# Altium PCB PCB1.PcbDoc
Units mil, origin at the board's own origin, x right, y up, seen from the top; angles counter-clockwise.
Board outline 3521.56 x 2561.56 mil, 2 copper layers (Top Layer, Bottom Layer); 40 components, 29 nets, 164 pads, 12 vias.
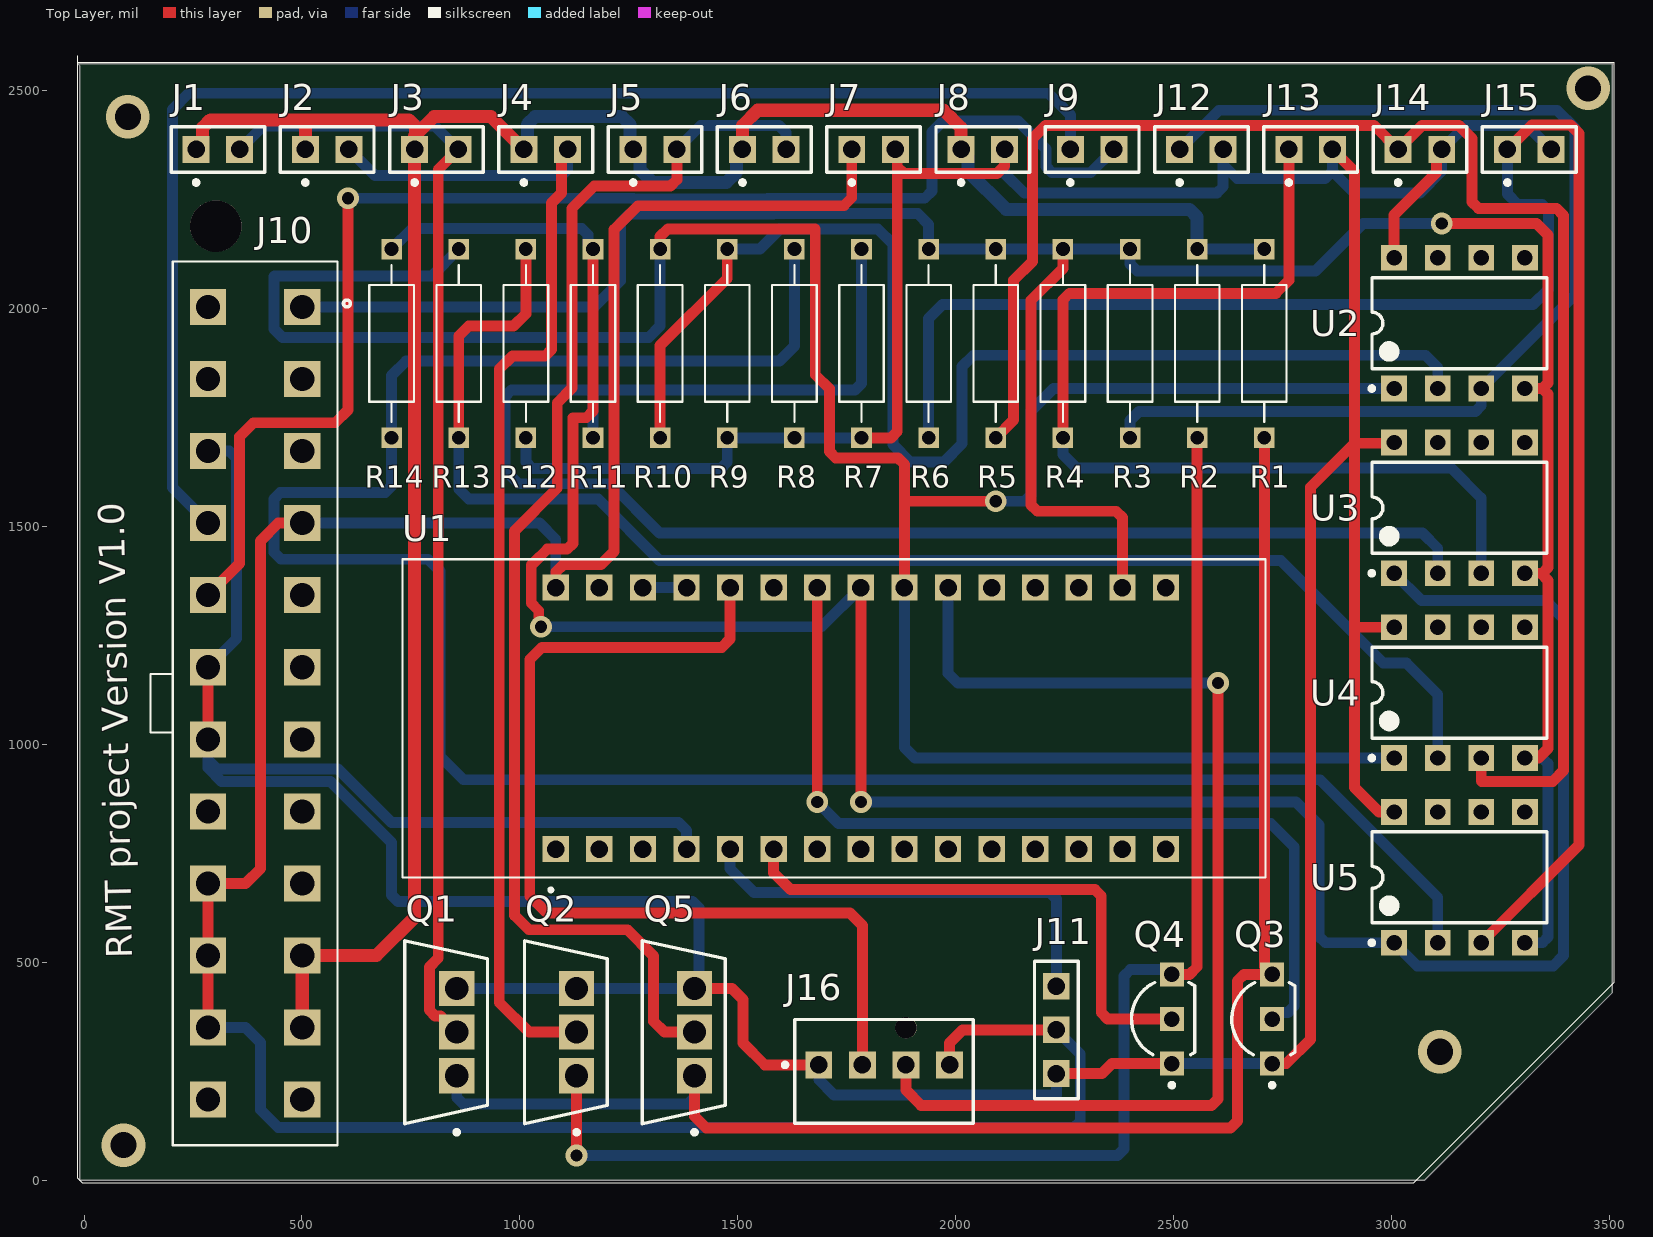
[diagram p0: Top Layer view]
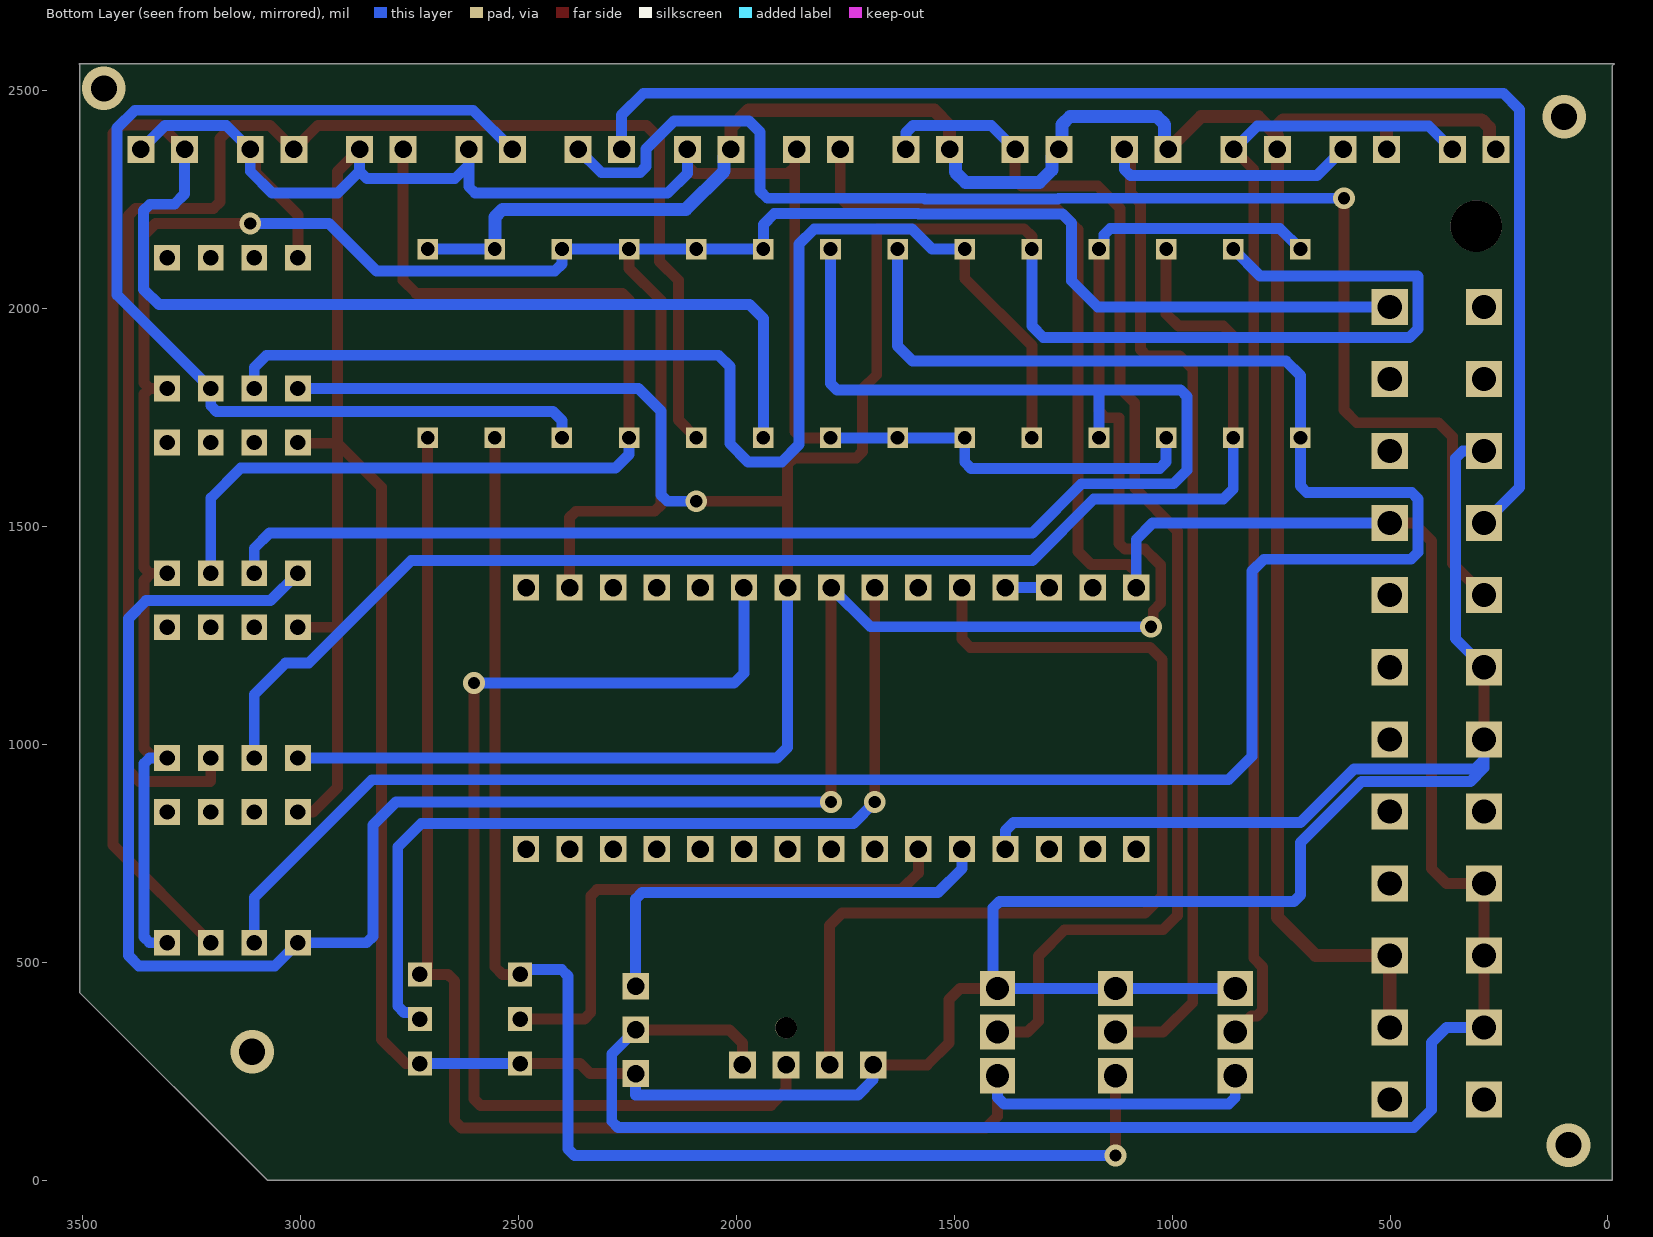
[diagram p1: Bottom Layer view, seen from below]
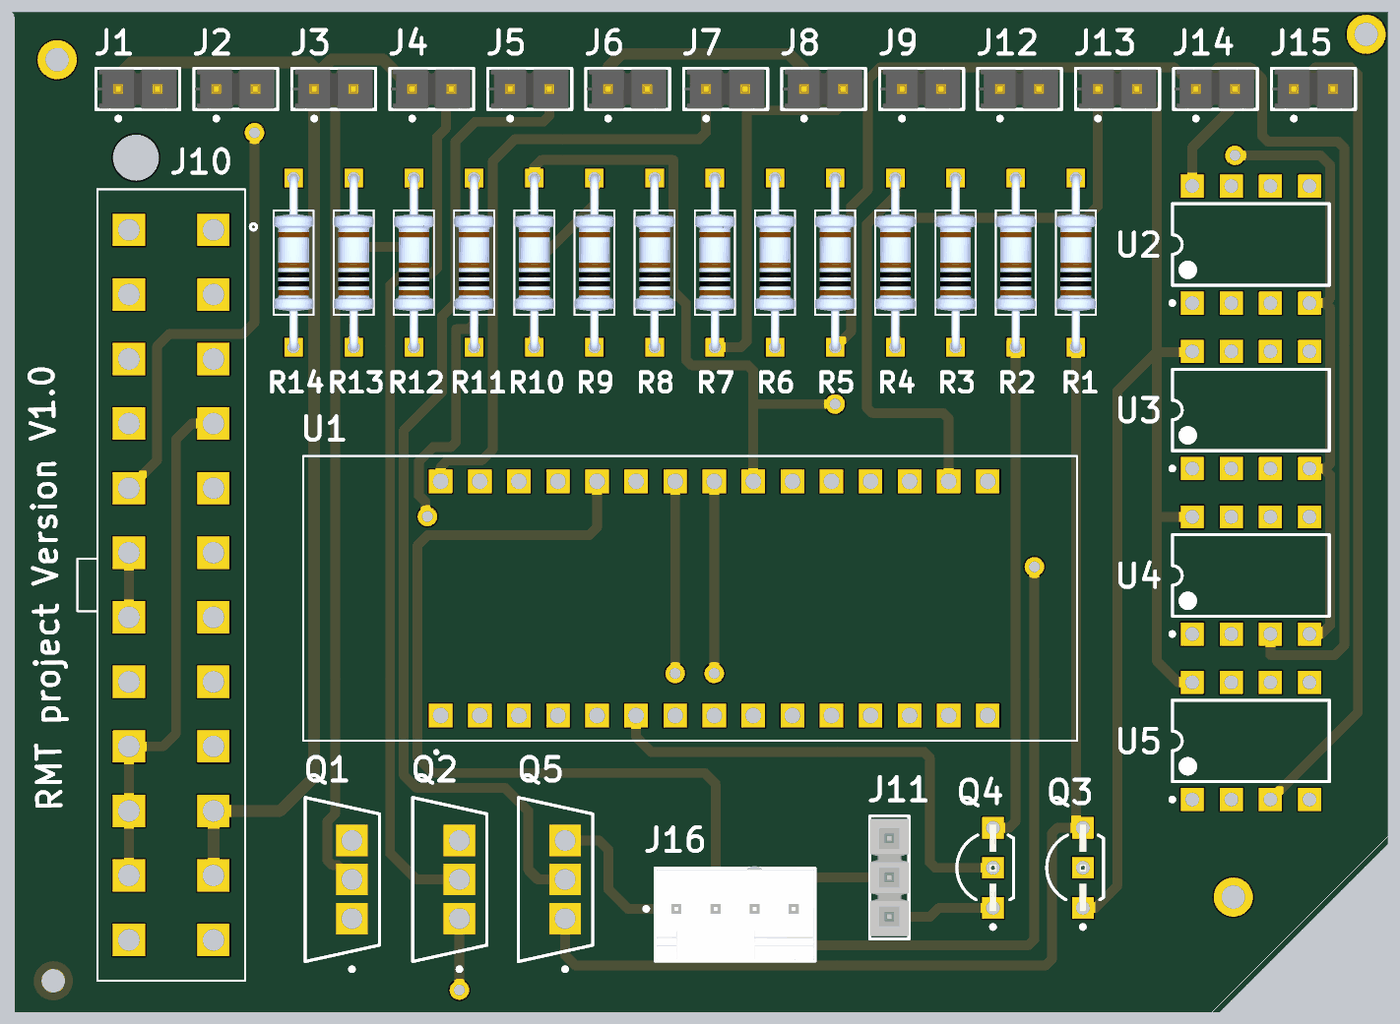
[diagram p2: 3D render of the assembled board from above, using the file's embedded part models]

## Layer stack, top to bottom
Top Solder: solder mask 0.4, Solder Resist, Dk 3.5
Top Layer: signal copper 1.4
Dielectric 1: dielectric 12.6, FR-4, Dk 4.8
Bottom Layer: signal copper 1.4
Bottom Solder: solder mask 0.4, Solder Resist, Dk 3.5

## Board outline
-14.32,2561.56 3507.24,2561.56 3505.68,2560 3505.68,430 3075.68,0 -9.32,0 -9.32,2556.56

## Design rules (kind name [scope] priority, off if disabled: settings)
Clearance [All] p1: gap=10 ignorepadtopadclearanceinfootprint=FALSE except(0: Arc-Hole Track-Hole SMDPad-Hole THPad-Hole Via-Hole Fill-Hole Poly-Hole Region-Hole Text-Hole)
PolygonConnect [All] p1: connectstyle=Relief reliefconductorwidth=10 reliefentries=4 polygonreliefangle="90 Angle" airgapwidth=10
RoutingVias [All] p1: holewidth=28 width=50 viastyle="Through Hole" minholewidth=28 minwidth=50 maxholewidth=28 maxwidth=50
SolderMaskExpansion [All] p1: expansion=4 istentingtop=FALSE
Width [All] p1: maxlimit=30 minlimit=15 preferedwidth=25 minimp=50.000000 maximp=50.000000 favimp=50.000000 checkconnectedcopper=TRUE
30 further rules are at their usual default settings.

## Components (designator, comment, footprint, x,y, rotation, side; value= is the part's Value field where it differs from the comment)
J1 "j10" FP-TSW-102-07-S-S-MFG 307.17,2365 r0 top
J2 "j10" FP-TSW-102-07-S-S-MFG 557.88,2365 r0 top
J3 "j10" FP-TSW-102-07-S-S-MFG 808.59,2365 r0 top
J4 "j10" FP-TSW-102-07-S-S-MFG 1059.3,2365 r0 top
J5 "j10" FP-TSW-102-07-S-S-MFG 1310.01,2365 r0 top
J6 "j6" FP-TSW-102-07-S-S-MFG 1560.72,2365 r0 top
J7 "j10" FP-TSW-102-07-S-S-MFG 1811.43,2365 r0 top
J8 "j16" FP-TSW-102-07-S-S-MFG 2062.14,2365 r0 top
J9 "J13" FP-TSW-102-07-S-S-MFG 2312.84,2365 r0 top
J10 "1-1775099-3" TE_1-1775099-3 392.41,1094.45 r270 top
J11 "TSW-103-07-L-S" SMTC-TSW-103-07-X-S 2230.68,445.05 r270 top
J12 "j10" FP-TSW-102-07-S-S-MFG 2563.55,2365 r0 top
J13 "j11" FP-TSW-102-07-S-S-MFG 2814.26,2365 r0 top
J14 "j10" FP-TSW-102-07-S-S-MFG 3064.97,2365 r0 top
J15 "j11" FP-TSW-102-07-S-S-MFG 3315.68,2365 r0 top
J16 "47053-3000" FP-47053-3000-MFG 1835.68,250.04 r180 top
Q1 "AUIRFZ44N" FP-TO-220AB-MFG 830.68,340 r180 top
Q2 "AUIRFZ44N" FP-TO-220AB-MFG 1105.68,340 r180 top
Q3 "2N5551RL1G" ONSC-TO-92-3-29-11_AM_BL 2725.68,370 r90 top
Q4 "2N5551RL1G" ONSC-TO-92-3-29-11_AM_BL 2495.68,370 r90 top
Q5 "AUIRFZ44N" FP-TO-220AB-MFG 1376.27,340 r180 top
R1 "1k" RESAD1100W55L680D260 2707.88,1920 r90 top
R2 "1k" RESAD1100W55L680D260 2553.87,1920 r90 top
R3 "1.5k" RESAD1100W55L680D260 2399.85,1920 r90 top
R4 "1.5k" RESAD1100W55L680D260 2245.84,1920 r90 top
R5 "1.5k" RESAD1100W55L680D260 2091.82,1920 r90 top
R6 "1.5k" RESAD1100W55L680D260 1937.8,1920 r90 top
R7 "27k" RESAD1100W55L680D260 1783.79,1920 r90 top
R8 "27k" RESAD1100W55L680D260 1629.77,1920 r90 top
R9 "27k" RESAD1100W55L680D260 1475.76,1920 r90 top
R10 "27k" RESAD1100W55L680D260 1321.74,1920 r90 top
R11 "27k" RESAD1100W55L680D260 1167.73,1920 r90 top
R12 "27k" RESAD1100W55L680D260 1013.71,1920 r90 top
R13 "27k" RESAD1100W55L680D260 859.69,1920 r90 top
R14 "27k" RESAD1100W55L680D260 705.68,1920 r90 top
U1 "NUCLEO-L432KC" MODULE_NUCLEO-L432KC 1720.68,1060 r90 top
U2 "LM358P" P0008A 3155.68,1966.58 r90 top
U3 "LM358P" P0008A 3155.68,1542.72 r90 top
U4 "LM358P" P0008A 3155.68,1118.86 r90 top
U5 "LM358P" P0008A 3155.68,695 r90 top

## Footprints (in the part's own frame and the unit in brackets; to place one, negate y for a bottom-side part, rotate by r counter-clockwise, add the part's x,y. Pads: shape width x height; smd on the part's side, far side on the other; paste and mask are expansions set on the pad)
FP-47053-3000-MFG [mm]
  rect 1.57x1.57 hole 1.02 paste-1000 mask+0: 1(3.81,-0.38) 2(1.27,-0.38) 3(-1.27,-0.38) 4(-3.81,-0.38)
  round 1.25 hole 1.25 unplated paste-1000 mask+0: ""(-1.27,-2.54)
  silkscreen extent -5.2,-3.02 5.9,3.02, body extent -5.3,-3.26 5.3,3.12, height 0.25
FP-TO-220AB-MFG [mm]
  rect 2.05x2.05 hole 1.35 paste-1000 mask+0: 1(-0.62,2.54) 2(-0.62,0) 3(-0.62,-2.54)
  silkscreen extent -2.41,-5.34 2.41,5.96
FP-TSW-102-07-S-S-MFG [mm]
  rect 1.57x1.57 hole 1.02 paste-1000 mask+0: 1(-1.27,0) 2(1.27,0)
  silkscreen extent -2.73,-2.05 2.73,1.34, body extent -2.67,-1.27 2.54,1.27, height 8.71
MODULE_NUCLEO-L432KC [mm]
  rect 1.53x1.53 hole 1.02: CN3_1(-7.62,16.215) CN3_2(-7.62,13.675) CN3_3(-7.62,11.135) CN3_4(-7.62,8.595) CN3_5(-7.62,6.055) CN3_6(-7.62,3.515) CN3_7(-7.62,0.975) CN3_8(-7.62,-1.565) CN3_9(-7.62,-4.105) CN3_10(-7.62,-6.645) CN3_11(-7.62,-9.185) CN3_12(-7.62,-11.725) CN3_13(-7.62,-14.265) CN3_14(-7.62,-16.805) CN3_15(-7.62,-19.345) CN4_1(7.62,16.215) CN4_2(7.62,13.675) CN4_3(7.62,11.135) CN4_4(7.62,8.595) CN4_5(7.62,6.055) CN4_6(7.62,3.515) CN4_7(7.62,0.975) CN4_8(7.62,-1.565) CN4_9(7.62,-4.105) CN4_10(7.62,-6.645) CN4_11(7.62,-9.185) CN4_12(7.62,-11.725) CN4_13(7.62,-14.265) CN4_14(7.62,-16.805) CN4_15(7.62,-19.345)
  silkscreen extent -10.1,-25.14 9.27,25.14
ONSC-TO-92-3-29-11_AM_BL [mm] "TO, 3-Leads, Body Dia 4.7mm, Pitch 2.6mm"
  rect 1.4x1.4 hole 0.9: 1(-2.6,0) 2(0,0) 3(2.6,0)
  silkscreen extent -3.97,-1.34 2.13,2.35, body extent -2.84,-1.34 2.84,2.35, height 5.33
P0008A [mm] "DIP, 8-Leads, Body 10.15x6.6mm, Pitch 2.54mm"
  rect 1.5x1.5 hole 0.9: 1(-3.81,3.81) 2(-3.81,1.27) 3(-3.81,-1.27) 4(-3.81,-3.81) 5(3.81,-3.81) 6(3.81,-1.27) 7(3.81,1.27) 8(3.81,3.81)
  silkscreen extent -3.93,-5.1 2.65,5.23, body extent -3.95,-5.07 3.95,5.07, height 5.08
RESAD1100W55L680D260 [mm]
  rect 1.2x1.2 hole 0.8: 1(-5.5,0) 2(5.5,0)
  silkscreen extent -4.58,-1.3 4.58,1.3, body extent -5.77,-1.29 5.77,1.29, height 2.6
SMTC-TSW-103-07-X-S [mm] ".025 SQ Post Terminal Strip Assembly, 1x3 Pins, Vertical, 2.54mm Pitch, Male"
  rect 1.55x1.55 hole 1.02: 1(0,0) 2(2.54,0) 3(5.08,0)
  silkscreen extent -1.46,-1.27 6.54,1.27, body extent -1.27,-1.27 6.35,1.27, height 8.38
TE_1-1775099-3 [mm]
  rect 2.1x2.1 hole 1.4: 1(-23.1,2.75) 2(-23.1,-2.75) 3(-18.9,2.75) 4(-18.9,-2.75) 5(-14.7,2.75) 6(-14.7,-2.75) 7(-10.5,2.75) 8(-10.5,-2.75) 9(-6.3,2.75) 10(-6.3,-2.75) 11(-2.1,2.75) 12(-2.1,-2.75) 13(2.1,2.75) 14(2.1,-2.75) 15(6.3,2.75) 16(6.3,-2.75) 17(10.5,2.75) 18(10.5,-2.75) 19(14.7,2.75) 20(14.7,-2.75) 21(18.9,2.75) 22(18.9,-2.75) 23(23.1,2.75) 24(23.1,-2.75)
  round 3 hole 3 unplated: ""(-27.8,-2.29)
  silkscreen extent -25.75,-6.1 25.75,5.55

## Part data
J1 J2 J3 J4 J5 J6 J7 J8 J9 J12 J13 J14 J15: library part CMP-1681-00004-5, "CONN HEADER VERT 2POS 2.54MM", Color=Black, Flammability Rating="UL94 V-0", Max Current Rating=7.6A, Max Operating Temperature=125°C, Max Voltage Rating (AC)=550V, Min Operating Temperature=-55°C, Package Quantity=1, Connector Type=Header, Contact Finish - Mating=GOLD, Contact Material=Bronze, Contact Mating Length=0.23inch, Contact Plating=Gold, Contact Shape=Square, Contact Type="Male Pin", Depth=2.54mm, Fastening Type=Pull, Gender=Male, Housing Color=Black, Housing Material=Polyester, Insulation Color=Black, Insulation Material=PBT, Lead Free="Lead Free", Length=5.08mm, Mount="Through Hole", Number of Contacts=2, Number of Positions=2, Number of Rows=1, Orientation=Straight, Packaging=Bulk, Pitch=2.54mm, Radiation Hardening=No, REACH SVHC="No SVHC", RoHS Compliant=Yes, Series=TSW, Termination=Solder, Width=2.54mm
J10: "Conn Power PL 24 POS 4.2mm Solder ST Thru-Hole 24 Terminal 1 Port Box/Tray", Package=None, Centerline_Pitch="4.2 mm[.165 in]", Digi-Key_Part_Number=A127799-ND, Digi-Key_Purchase_URL=https://www.digikey.com.au/product-detail/en/te-connectivity-amp-connectors/1-1775099-3/A127799-ND/5272985?utm_source=snapeda&utm_medium=aggregator&utm_campaign=symbol, MF="TE Connectivity", MP=1-1775099-3, Number_of_Positions=24, Product_Type=Connector, SnapEDA_Link=https://www.snapeda.com/parts/1-1775099-3/TE%20Connectivity%20AMP%20Connectors/view-part/890778/?ref=snap, TE_purchase_URL=https://www.te.com/usa-en/product-1-1775099-3.html?te_bu=Cor&te_type=disp&te_campaign=seda_glo_cor-seda-global-disp-prtnr-fy19-seda-model-bom-cta_sma-317_1&elqCampaignId=32493
J11: library part CMP-1024-00334-1, "0.025\" SQ Post Header, Through-hole, Vertical, -55 to 125 degC, 2.54 mm Pitch, 3-Pin, Male, RoHS", Manufacturer=Samtec, Temperature Range="-55 to 125 degC", ComponentLink1Description="Manufacturer URL", ComponentLink1URL=http://www.samtec.com, ComponentLink2Description=Datasheet, ComponentLink2URL=http://www.samtec.com/documents/webfiles/pdf/TSW_TH.PDF, ComponentLink3Description="Package Specification", ComponentLink3URL=http://www.samtec.com/documents/webfiles/cpdf/TSW-XXX-XX-XXX-X-XX-XXX-MKT.pdf, DatasheetVersion=F-214, Mounting Technology=Through-hole, Orientation=Vertical, PackageDescription=".025[0.64] SQ. Post Terminal Strip Assembly", PackageReference=TSW-103-07-X-S, PackageVersion="DM, 8/1988", PartNumber=TSW-103-07-L-S, Pitch="2.54 mm", RoHS=True
J16: library part CMP-04776-000447-1, "CONN HEADER VERT 4POS 2.54MM", Current Rating=4A, Max Operating Temperature=75°C, Min Operating Temperature=0°C, Package Quantity=12000, Voltage Rating=250V, Contact Material="Copper Alloy", Contact Plating=Tin, Gender=Male, Glow Wire Compliant=Non-compliant, Halogen Free="Low Halogen", Mount="Through Hole", Number of Circuits=4, Number of Contacts=4, Number of Positions=4, Number of Rows=1, Orientation=Straight, Packaging=Bulk, Pitch=2.54mm, REACH SVHC="No SVHC", RoHS Compliant=Yes, Series=47053, Termination="Through Hole"
Q1 Q2 Q5: library part CMP-00196-65872631-1, "AUIRFZ44N Automotive Q101 55V Single N-Channel HEXFET Power MOSFET in a TO-220AB Package, TO220-3, RoHS", Case/Package=TO-220AB, Continuous Drain Current (ID)=49A, Drain to Source Breakdown Voltage=55V, Drain to Source Resistance=17.5mΩ, Gate to Source Voltage (Vgs)=20V, Input Capacitance=1.47nF, Max Junction Temperature (Tj)=175°C, Max Power Dissipation=94W, Min Operating Temperature=-55°C, Package Quantity=1000, Threshold Voltage=2V, Contact Plating=Tin, Drain to Source Voltage (Vdss)=55V, Element Configuration=Single, Fall Time=60ns, Height=16.51mm, Length=10.66mm, Lifecycle Status=Obsolete, Max Operating Temperature=175°C, Mount="Surface Mount, Through Hole", NexarPartId=65872631, Number of Channels=1, Number of Elements=1, Number of Pins=3, On-State Resistance=17.5mΩ, Power Dissipation=94W, Radiation Hardening=No, Rds On Max=17.5mΩ, REACH SVHC="No SVHC", Rise Time=69ns, RoHS=Compliant, Schedule B="8541290080, 8541290080", Turn-Off Delay Time=44ns, Turn-On Delay Time=7.3ns, Width=4.82mm
Q3 Q4: library part CMP-1048-01479-1, "Amplifier Transistor, NPN Silicon, 3-Pin TO-92, Pb-Free, Tape and Reel", Manufacturer="On Semiconductor", ComponentLink1Description="Manufacturer URL", ComponentLink1URL=http://www.onsemi.com/, ComponentLink2Description=Datasheet, ComponentLink2URL=http://www.onsemi.com/pub_link/Collateral/2N5550-D.PDF, ComponentLink3Description="Package Specification", ComponentLink3URL=http://www.onsemi.com/pub_link/Collateral/MAC97-D.PDF, DatasheetVersion="Rev. 5", fT Min (MHz)=100, IC Continuous (A)=0.6, Mounting Technology="Through Hole", PackageDescription="3-Pin Transistor Outline, Body 4.825 x 3.685 mm, Pitch 1.27 mm", PackageReference=TO-92-3-29-11_AM_BL, PackageVersion="Rev. AM", Packing="Tape and Reel", PartNumber=2N5551RL1G, Polarity=NPN, RoHS=TRUE
R1 R2 R3 R4 R5 R6 R7 R8 R9 R10 R11 R12 R13 R14: library part MFR-25FBF52-1K, "1.07 kOhms Â±1% 0.25W, 1/4W Through Hole Resistor Axial - Metal Film", Package="Axial Yageo", Availability="In Stock", Check_prices=https://www.snapeda.com/parts/MFR-25FBF52-1K/Yageo/view-part/?ref=eda, MF=Yageo, MP=MFR-25FBF52-1K, Price=None, Purchase-URL=https://pricing.snapeda.com/search/part/MFR-25FBF52-1K/?ref=eda, SnapEDA_Link=https://www.snapeda.com/parts/MFR-25FBF52-1K/Yageo/view-part/?ref=snap
U1: "STM32 Nucleo-32 development board with STM32L432KC MCU, supports Arduino connectivity", Package=None, Availability=Unavailable, MP=NUCLEO-L432KC, Price=None
U2 U3 U4 U5: library part CMP-2000-06549-1, "Dual Operational Amplifier, 3 to 32 V, 0 to 70 degC, 8-Pin PDIP (P), RoHS, Tape and Reel", Manufacturer="Technik Industrial", Package Description="8-Pin Double In-line Package, Body 9.59 x 6.35 mm, Pitch 2.54 mm", Package Reference=P8, Datasheet URL=http://www.ti.com/lit/ds/symlink/lm358.pdf, Datasheet Version="Rev. T, 04/2015", Manufacturer URL=http://www.technik.com.hk/, Mounting Technology=ThroughHole, Package URL=http://www.ti.com/lit/ml/mpdi001b/mpdi001b.pdf

## Via types
v1: diameter 50, hole 28, Top Layer to Bottom Layer, 8 vias
v2: diameter 100, hole 60, Top Layer to Bottom Layer, 3 vias
v3: diameter 100, hole 60, Top Layer to Bottom Layer, tented top, 1 vias

## Nets (pads, with @x,y where several pads share a name; then routed paths per layer and width w, separated by ;. In a path a pad name is that pad's centre, name@x,y a point inside that pad or via, vN(x,y) a via of type N, cw(c..) or ccw(c..) an arc to the next point about the centre after c; other vN are vias at no path point)
GND: J7.2 J8.2 J10.6 J10.12 J10.14 J11.3 J12.2 J13.2 J14.2 J15.2 J16.1 Q1.3 Q2.3 Q3.1 Q4.1 Q5.3 R7.1 R8.1 R9.1 R12.1 U1.CN3_4 U2.8 U3.8 U4.8 U5.8 | length 12798.2
  Top Layer w25: J10.14 284.68,1011.77 284.68,1177.13 J10.12 ; Q5.3 1486.68,440 1511.68,415 1511.68,315 1561.68,265 J16.1 ; R7.1 1851.03,1703.46 1865.68,1718.11 1865.68,2325.5 ; J7.2 1865.68,2365 1865.68,2325.5 ; J8.2 2112.14,2327.46 2094.68,2310 1881.18,2310 1865.68,2325.5 ; J11.3 2335.73,245.05 2358.32,267.64 Q4.1 ; Q3.1 2758.18,267.64 2813.68,323.14 2813.68,1590.17 2914.54,1691.03 ; J13.2 2914.54,2314.72 2914.54,1691.03 ; U3.8@3003.99,1691.03 2914.54,1691.03 ; U5.8 2970.68,845 2914.54,901.14 2914.54,1268.86 ; U4.8 2914.54,1268.86 ; U2.8 3005.68,2215 3102.9,2312.22 3102.9,2352.93 J14.2 ; 2914.54,1268.86 2914.54,1691.03
  Bottom Layer w25: J10.14 284.14,965 ; J10.12 349.68,1242.66 349.68,1656.69 333.18,1673.19 J10.6 ; Q1.3 Q2.3 Q5.3 1410.68,450 1410.68,625.36 1396.03,640 720.32,640 705.68,654.65 705.68,775 565.68,915 315.68,915 284.14,946.54 284.14,965 ; R12.1 1013.71,1647.65 1028.35,1633 1461.11,1633 1475.76,1647.65 R9.1 R8.1 1629.77,1703 1783.79,1703 R7.1 ; U1.CN3_4 1382.29,802.5 1363.79,821 705.68,821 582.68,944 305.14,944 284.14,965 ; J16.1 1685.68,231 1720.68,196 2230.68,196 J11.3 ; J8.2 2112.14,2310.14 2157.27,2265 2598.91,2265 2613.55,2279.65 2613.55,2330.13 ; Q4.1 Q3.1 ; J12.2 2613.55,2330.13 ; J13.2 2864.26,2315 ; J15.2 3310.68,2420 3169.97,2420 J14.2 3114.97,2315 3064.97,2265 2914.26,2265 2864.26,2315 ; 2613.55,2330.13 2645.68,2298 2847.26,2298 2864.26,2315
NetJ1_1: J1.1 J2.1 J3.1 J4.1 J5.1 J6.1 J8.1 J10.19 J10.21 R1.2 R2.2 | length 5414.1
  Top Layer w25: 489.88,2433 507.88,2415 ; J3.1 758.59,2395.91 758.59,2420.09
  Top Layer w30: J1.1 272.2,2380.02 272.2,2415.43 289.77,2433 489.88,2433 745.68,2433 758.59,2420.09 ; J10.21 J10.19 670.68,515.71 758.59,603.62 J3.1 ; J2.1 507.88,2415 ; 758.59,2395.91 803.37,2440.7 933.6,2440.7 J4.1 ; J6.1 1510.72,2420.04 1545.68,2455 1972.14,2455 2012.14,2415 J8.1
  Bottom Layer w25: R2.2 R1.2
  Bottom Layer w30: J4.1 1017.03,2372.73 1017.03,2422.73 1035,2440.7 1234.31,2440.7 1252.28,2422.73 J5.1@1252.28,2372.73 ; J5.1 1275.92,2349.1 1275.92,2317.85 1304.55,2289.21 1473.38,2289.21 1497.22,2313.05 1497.22,2351.5 J6.1 ; J8.1 2027.81,2349.32 2027.81,2315.23 2115.54,2227.5 2536.29,2227.5 2553.87,2209.93 R2.2
NetJ1_2: J1.2 J3.2 Q1.2 | length 2632
  Top Layer w25: Q1.2 817.94,377.15 805.41,377.15 792.23,390.33 792.23,489.67 812.68,510.12 812.68,2319.09 J3.2
  Bottom Layer w25: J1.2 411.17,2419 804.59,2419 J3.2
NetJ2_2: J2.2 J4.2 Q2.2 | length 2849.9
  Top Layer w25: J4.2 1095.68,2351.38 1095.68,2265 1072.68,2242 1072.68,1905.97 1058.03,1891.33 982.68,1891.33 952.69,1861.33 952.69,407.99 1020.68,340 Q2.2
  Bottom Layer w25: J2.2 667.88,2305 1095.68,2305 1109.3,2318.62 J4.2
NetJ5_2: J5.2 J6.2 Q5.2 | length 2944.5
  Top Layer w25: J5.2 1360.01,2295.65 1345.37,2281 1170.68,2281 1119.68,2230 1119.68,1817.66 1085.68,1783.66 1085.68,1588.08 987.69,1490.08 987.69,607.99 1020.68,575 1246.68,575 1306.68,515 1306.68,365 1331.68,340 Q5.2
  Bottom Layer w25: J5.2 1415.01,2420 1594.68,2420 1610.72,2403.96 J6.2
NetJ7_1: J7.1 J10.7 J10.18 J10.20 J10.22 J11.2 J16.4 U1.CN4_1 | length 6383.9
  Top Layer w25: J10.22 J10.20 J10.18 370.74,681.06 404.68,715 404.68,1466.83 445.68,1507.83 J10.7 ; U1.CN4_1 1082.29,1395.61 1099.68,1413 1185.87,1413 1215.68,1442.8 1215.68,2181 1270.68,2236 1743.17,2236 1761.43,2254.26 J7.1 ; J16.4 1985.68,315 2015.73,345.05 J11.2
  Bottom Layer w25: J10.22 370.68,350.35 404.68,316.35 404.68,162 445.68,121 2271.03,121 2285.68,135.65 2285.68,290.05 J11.2 ; J10.7 1044.84,1507.83 1082.29,1470.38 U1.CN4_1
NetJ9_1: J9.1 J10.8 | length 3158.2
  Bottom Layer w25: J10.8 202.68,1589.3 202.68,2457 239.68,2494 2212.94,2494 2262.84,2444.1 J9.1
NetJ9_2: J9.2 J10.10 | length 3159.2
  Top Layer w25: J10.10 356.68,1415.02 356.68,1706 388.68,1738 576.5,1738 605.68,1767.18 v1(605.68,2253)
  Bottom Layer w25: v1(605.68,2253) 1260.41,2253 1261.7,2251.71 1566.89,2251.71 1568.18,2253 1928.68,2253 1945.68,2270 1945.68,2405 1970.68,2430 2142.68,2430 2206.68,2366 2206.68,2325.59 2220.68,2311.59 2309.44,2311.59 J9.2
NetJ10_1: J10.1 R3.2 R4.2 R5.2 R6.2 U1.CN4_14 U2.4 U3.4 U4.4 U5.4 | length 6045.5
  Top Layer w25: R4.2 2245.84,2092.16 2172.68,2019 2172.68,1549.65 2187.32,1535 2367.65,1535 2382.29,1520.36 U1.CN4_14 ; v1(3114.97,2195) 3332.68,2195 3358.68,2169 3358.68,1829.57 3345.68,1816.57 ; U4.4 3336.56,968.86 3358.68,990.97 3358.68,1376.53 3342.49,1392.72 ; U3.4 3342.49,1392.72 ; U2.4 3345.68,1816.57 ; 3342.49,1392.72 3345.68,1392.72 3358.68,1405.72 3358.68,1803.57 3345.68,1816.57
  Bottom Layer w25: J10.1 1170.68,2003.9 1230.68,2063.9 1230.68,2196 1251.39,2216.71 1581.39,2216.71 1582.67,2218 1912.68,2218 1937.8,2192.87 R6.2@1937.8,2137 ; R6.2 R6.2@1937.8,2137 ; R5.2 R5.2@2091.82,2137 ; v1(3114.97,2195) 2934.18,2195 2825.18,2086 2416.35,2086 2399.85,2102.5 R3.2 R4.2 2245.84,2137 R5.2@2091.82,2137 ; U5.4 3345.68,545 3358.68,558 3358.68,955.86 3345.68,968.86 U4.4 ; R6.2@1937.8,2137 R5.2@2091.82,2137
NetJ12_1: J12.1 R3.1 U2.3 | length 2546.7
  Bottom Layer w25: R3.1 2399.85,1743.17 2420.68,1764 3192.18,1764 3205.68,1777.5 U2.3 3420.68,2031.57 3420.68,2414 3379.68,2455 2603.55,2455 J12.1
NetJ13_1: J13.1 R4.1 U3.3 | length 2365.8
  Top Layer w25: R4.1 2245.84,2020.36 2260.48,2035 2734.26,2035 2764.26,2065 J13.1
  Bottom Layer w25: R4.1 2245.84,1665 2276.84,1634 3136.68,1634 3205.68,1565 U3.3
NetJ14_1: J14.1 R5.1 U4.3 | length 3695
  Top Layer w25: R5.1 2132.68,1744.32 2132.68,2065 2175.68,2108 2175.68,2390 2205.68,2420 2959.97,2420 J14.1 3069.97,2420 3154.68,2420 3184.68,2390 3184.68,2244.65 3199.32,2230 3378.03,2230 3394.68,2213.36 3394.68,940 3369.68,915 3206.68,915 3205.68,916 U4.3
NetJ15_1: J15.1 R6.1 U5.3 | length 4260.5
  Top Layer w25: U5.3 3429.68,769 3429.68,2401.5 3410.18,2421 3321.68,2421 J15.1
  Bottom Layer w25: R6.1 1937.8,1977.13 1969.68,2009 3324.69,2009 3359.68,2043.99 3359.68,2224.82 3345.03,2239.46 3289.18,2239.46 3265.68,2262.96 J15.1
NetJ16_2: J16.2 U1.CN4_5 | length 2250.8
  Top Layer w25: U1.CN4_5 1482.29,1241.65 1463.15,1222.5 1050.32,1222.5 1022.69,1194.86 1022.69,652.31 1062,613 1757.68,613 1785.68,585 J16.2
NetJ16_3: J16.3 U1.CN4_10 | length 2574.2
  Top Layer w25: J16.3 1885.68,207 1920.68,172 2587.03,172 2601.68,186.65 v1(2601.68,1141)
  Bottom Layer w25: U1.CN4_10 1982.29,1163.39 2004.68,1141 v1(2601.68,1141)
NetQ1_1: Q1.1 Q3.3 Q5.1 R1.1 | length 3660.2
  Top Layer w25: Q5.1 1400.68,146.99 1427.67,120 2630.68,120 2646.48,135.8 2646.48,457.72 2661.13,472.36 Q3.3 2707.88,490.16 R1.1
  Bottom Layer w25: Q1.1 855.09,190 870.09,175 1385.68,175 1400.68,190 Q5.1
NetQ2_1: Q2.1 Q4.3 R2.1 | length 3241.1
  Top Layer w25: v1(1130.09,57) Q2.1 ; Q4.3 2536.23,472.36 2553.87,490 R2.1
  Bottom Layer w25: v1(1130.09,57) 2371.03,57 2385.68,71.65 2385.68,468.6 2400.32,483.25 2484.8,483.25 Q4.3
NetQ3_2: Q3.2 U1.CN4_7 | length 2057.6
  Top Layer w25: v1(1682.29,868) U1.CN4_7
  Bottom Layer w25: v1(1682.29,868) 1731.29,819 2722.68,819 2776.68,765 2776.68,399.7 2762.03,385.06 2740.74,385.06 Q3.2
NetQ4_2: Q4.2 U1.CN3_6 | length 1263.7
  Top Layer w25: U1.CN3_6 1582.29,705.39 1620.68,667 2319.03,667 2333.68,652.36 2333.68,384.65 2348.32,370 Q4.2
NetR7_2: R7.2 R11.1 U3.2 | length 3690.9
  Bottom Layer w25: R11.1 1167.73,1809.87 1170.97,1813.11 ; R7.2 1783.79,1827.76 1769.14,1813.11 1170.97,1813.11 ; U3.2 3105.68,1450 3070.68,1485 1320.68,1485 1207.68,1598 996.68,1598 965.68,1629 965.68,1798.47 980.32,1813.11 1170.97,1813.11
NetR8_2: R8.2 R14.1 U5.2 | length 5183.7
  Bottom Layer w25: R8.2 1629.77,1914.09 1595.56,1879.88 739.14,1879.88 705.68,1846.42 R14.1 705.68,1592.65 691.03,1578 450.32,1578 435.68,1563.36 435.68,1441 451.68,1425 789.5,1425 816.68,1397.82 816.68,973 870.68,919 2835.68,919 3105.68,649 U5.2
NetR9_2: R9.2 R10.1 U2.2 | length 2902
  Top Layer w25: R10.1 1321.74,1915 1475.76,2069.02 R9.2
  Bottom Layer w25: R9.2 1550.71,2136.54 1596.83,2182.66 1821.02,2182.66 1855.68,2148 1855.68,1688 1895.68,1648 1972.68,1648 2014.68,1690 2014.68,1867.04 2040.64,1893 3077.68,1893 3105.68,1865 U2.2
NetR10_2: R10.2 R13.2 U1.CN4_9 U2.1 U4.1 | length 5878
  Top Layer w25: R10.2 1321.74,2165 1339.74,2183 1676.68,2183 1677.68,2182 1677.68,1848.28 1710,1815.96 1710,1671.99 1724.64,1657.34 1867.65,1657.34 1882.29,1642.7 1882.29,1558 ; U1.CN4_9 1882.29,1558 ; v1(2091.68,1558) 1882.29,1558
  Bottom Layer w25: R13.2 798.16,2075 436.68,2075 435.68,2074 435.68,1953.5 455.18,1934 1295.68,1934 1321.74,1960.06 R10.2 ; U1.CN4_9 1882.29,993.39 1906.82,968.86 U4.1 ; v1(2091.68,1558) 2158.03,1558 2172.68,1572.65 2172.68,1765 2224.25,1816.57 U2.1
NetR11_2: R11.2 R14.2 U1.CN4_8 U3.1 U5.1 | length 5889.1
  Top Layer w25: v1(1048.18,1270) 1043.39,1274.78 1043.39,1306.84 1026.01,1324.22 1026.01,1411.34 1032.02,1417.35 1062.67,1448 1108.18,1448 1121.6,1461.43 1121.6,1749.59 1152.31,1749.59 1167.73,1765 R11.2 ; v1(1782.29,868) U1.CN4_8
  Bottom Layer w25: R14.2 753.14,2184 1141.96,2184 1156.6,2169.36 1156.6,2147.66 R11.2 ; v1(1048.18,1270) 1692.29,1270 U1.CN4_8 ; v1(1782.29,868) 2780.68,868 2833.68,815 2833.68,559.65 2848.32,545 U5.1 3058.68,492 3370.68,492 3394.68,516 3394.68,1289 3353.68,1330 3068.39,1330 U3.1
NetR12_2: R12.2 R13.1 U4.2 | length 3261.9
  Top Layer w25: R13.1 859.69,1937.02 882.68,1960 985.68,1960 1013.71,1988.03 R12.2
  Bottom Layer w25: R13.1 859.69,1585.98 882.68,1563 1179.68,1563 1320.68,1422 2745.68,1422 2980.68,1187 3033.68,1187 3105.68,1115 U4.2
NetU1_CN4_3: U1.CN4_3 U1.CN4_4 | length 100
  Bottom Layer w25: U1.CN4_3 U1.CN4_4
NetU1_CN4_11: U1.CN4_11
NetU1_CN4_12: U1.CN4_12
"Proximity Sensor": J11.1 U1.CN3_5 | length 1022.5
  Bottom Layer w25: U1.CN3_5 1482.29,715 1537.29,660 2216.03,660 2230.68,645.36 J11.1
pads on no net: J10. J10.2 J10.3 J10.4 J10.5 J10.9 J10.11 J10.13 J10.15 J10.16 J10.17 J10.23 J10.24 J16. U1.CN3_1 U1.CN3_2 U1.CN3_3 U1.CN3_7 U1.CN3_8 U1.CN3_9 U1.CN3_10 U1.CN3_11 U1.CN3_12 U1.CN3_13 U1.CN3_14 U1.CN3_15 U1.CN4_2 U1.CN4_6 U1.CN4_13 U1.CN4_15 U2.5 U2.6 U2.7 U3.5 U3.6 U3.7 U4.5 U4.6 U4.7 U5.5 U5.6 U5.7
copper on no net:
  other v2: 3110.68,295 100.68,2440 3450.68,2505
  other v3: 90.68,80.67

## Silkscreen, mask and mechanical layers (free items; w line width, h text height)
Top Overlay:
  lines w0.5: -14.32,2580 -14.32,5 -4.32,-5 3050.68,-5 3510.68,455 3510.68,2565 -13.72,2565
  text "RMT project Version V1.0" at 110.51,509.45 h60 r91.04